# Altium PCB TS6A22362-PJ31A6A-PCB.pcbdoc
Units mil, origin at the board's own origin, x right, y up, seen from the top; angles counter-clockwise.
Board outline not stored, 2 copper layers (Top Layer, Bottom Layer); 3 components, 0 nets, 19 pads, 0 vias.
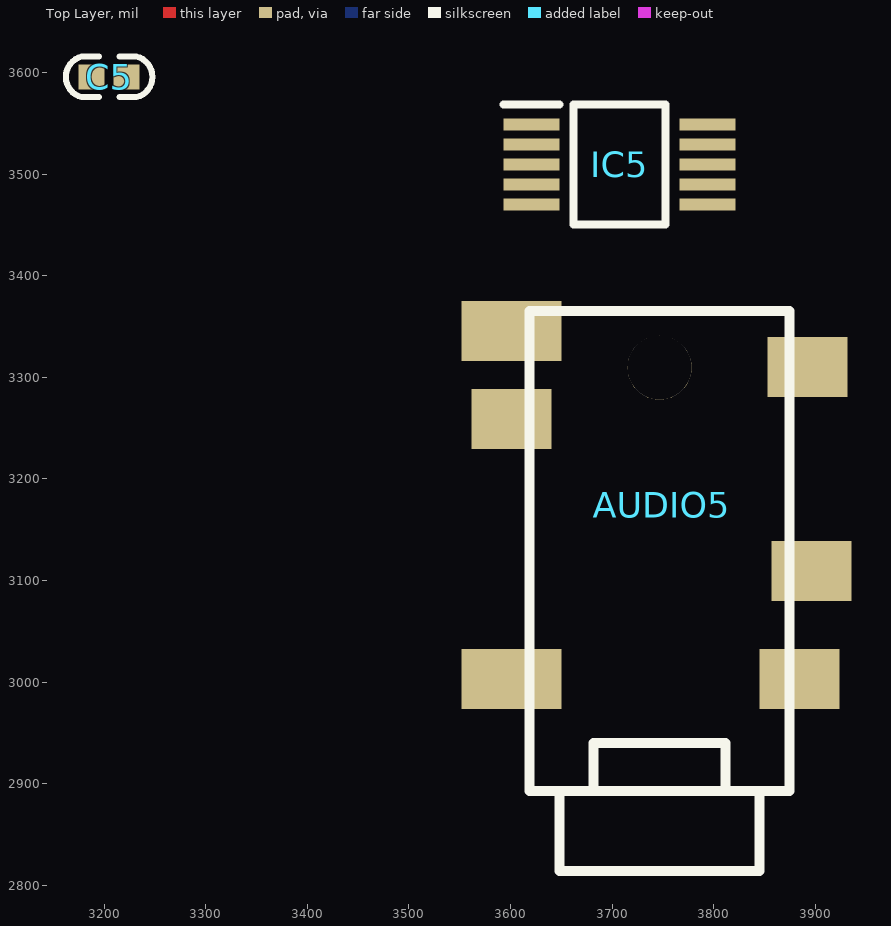
[diagram p0: Top Layer view]
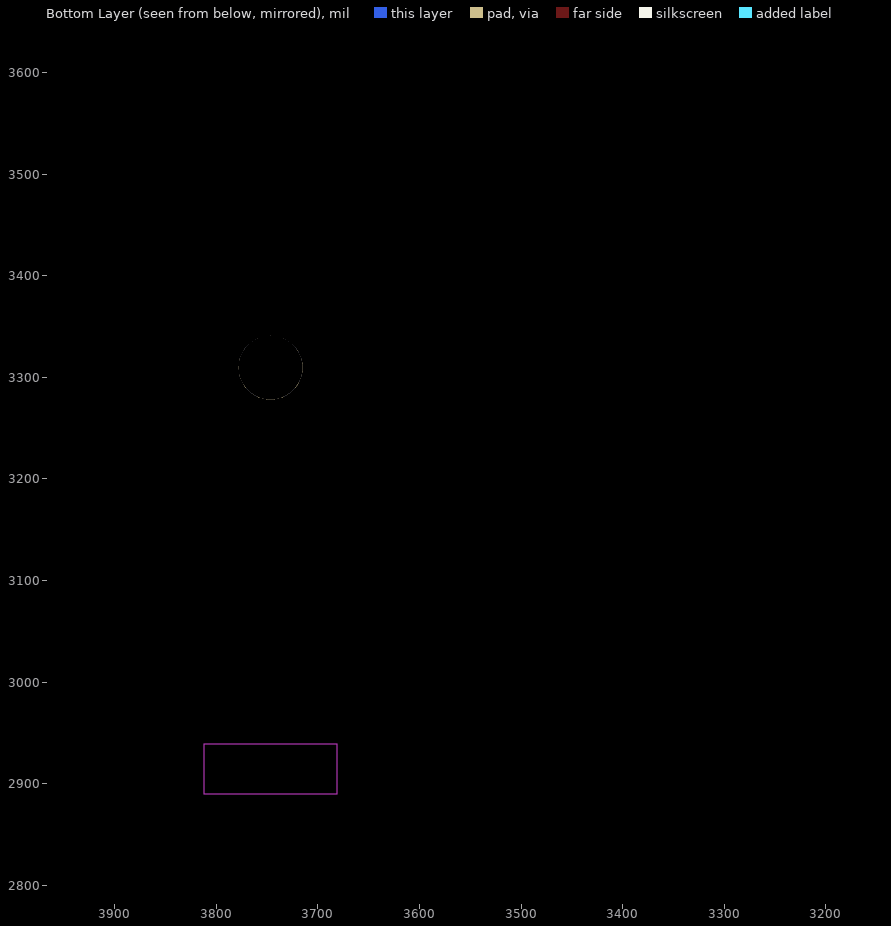
[diagram p1: Bottom Layer view, seen from below]

## Layer stack, top to bottom
Top Solder: solder mask 0.4, Solder Resist, Dk 3.5
Top Layer: signal copper 1.4
Dielectric 1: dielectric 12.6, FR-4, Dk 4.8
Bottom Layer: signal copper 1.4
Bottom Solder: solder mask 0.4, Solder Resist, Dk 3.5

## Components (designator, comment, footprint, x,y, rotation, side; value= is the part's Value field where it differs from the comment)
AUDIO5 "PJ-316A-6A" PJ-316A-6A 3746.61,3174.49 r180 top
C5 "100nF 16V" 0402C 3204.88,3595.75 r180 top
IC5 "TS5A22362DGSR" SOP50P490X110-10N 3707.24,3509.69 r0 top

## Footprints (in the part's own frame and the unit in brackets; to place one, negate y for a bottom-side part, rotate by r counter-clockwise, add the part's x,y. Pads: shape width x height; smd on the part's side, far side on the other; paste and mask are expansions set on the pad)
0402C [mm]
  rect 0.65x0.62 smd: 1(-0.44,0) 2(0.44,0)
  silkscreen extent -1.08,-0.51 1.08,0.51, body extent -0.51,-0.25 0.49,0.25, height 0.55
PJ-316A-6A [mm]
  rect 2x1.5 smd: 1(-3.5,4.35) 2(3.7,-2.15) 3(-3.8,1.65) 6(-3.7,-3.45)
  rect 2.5x1.5 smd: 4(3.7,4.35) 5(3.7,-4.35)
  round 1.6 hole 1.6 unplated: ""(0,-3.429)
  Keep-Out Layer board cut-out: -1.651,5.969 1.651,5.969 1.651,7.239 -1.651,7.239
  silkscreen extent -3.25,-4.85 3.25,9.15, body extent -4.05,-4.9 4.25,9.1, height 4.4
SOP50P490X110-10N [mm]
  rect 1.4x0.3 smd: 1(-2.2,1) 2(-2.2,0.5) 3(-2.2,0) 4(-2.2,-0.5) 5(-2.2,-1) 6(2.2,-1) 7(2.2,-0.5) 8(2.2,0) 9(2.2,0.5) 10(2.2,1)
  silkscreen extent -2.9,-1.5 1.15,1.5, body extent -2.45,-1.5 2.45,1.5, height 1.1

## Part data
AUDIO5: BOM_Manufacturer=HRO, Manufacturer 1="HRO Electronics", Supplier Part Number 1=C128987, BOM_Manufacturer Part=PJ-316A-6A, BOM_Supplier=LCSC, BOM_Supplier Part=C128987, Contributor=LCSC, Manufacturer Part Number 1=PJ-316A-6A, Pricing 1="1=0.2891, 10=0.2162, 30=0.2027, 100=0.1893, 500=0.1834, 1000=0.1804, 1=0.2697, 10=0.2016, 30=0.1891, 100=0.1766, 500=0.171, 1000=0.1683, 1=1.3646, 10=1.0202, 30=0.9569, 100=0.8936, 500=0.8654, 1000=0.8515, 1=1.3049, 10=0.9755, 30=0.9149, 100=0.8544, 500=0.8275, 1000=0.8142, 1=0.1752, 10=0.131, 30=0.1229, 100=0.1147, 500=0.1111, 1000=0.1093, 1=0.1579, 10=0.118, 30=0.1107, 100=0.1034, 500=0.1001, 1000=0.0985, 1=1.5823, 10=1.1829, 30=1.1095, 100=1.0361, 500=1.0035, 1000=0.9873, 1=21.3783, 10=15.982, 30=14.9903, 100=13.9984, 500=13.5574, 1000=13.3397, 1=0.8481, 10=0.634, 30=0.5947, 100=0.5553, 500=0.5378, 1000=0.5292, 1=16.4487, 10=12.2967, 30=11.5336, 100=10.7705, 500=10.4312, 1000=10.2637, 1=1.8173, 10=1.3586, 30=1.2743, 100=1.19, 500=1.1525, 1000=1.134, 1=0.2784, 10=0.2081, 30=0.1952, 100=0.1823, 500=0.1765, 1000=0.1737, 1=0.20414, 10=0.15261, 30=0.14314, 100=0.13367, 500=0.12946, 1000=0.12738 (AUD)", spicePre=A, Stock 1=6091, Supplier 1=LCSC
C5: library part CAP-NP
IC5: "模拟切换芯片", Case/Package=VSSOP, High Level Output Current=150mA, Manufacturer 1="Texas Instruments", Max Operating Temperature=85°C, Max Supply Current=1.3uA, Max Supply Voltage=5.5V, Min Operating Temperature=-40°C, Min Supply Voltage=2.3V, Mouser Part Number=595-TS5A22362DGSR, Nominal Supply Current=200nA, On-State Resistance=940mR, Package Quantity=1, Supplier Part Number 1=C201663, Arrow Part Number=TS5A22362DGSR, Arrow Price/Stock=https://www.arrow.com/en/products/ts5a22362dgsr/texas-instruments, Bandwidth=17MHz, ComponentLink1Description=http://www.ti.com/lit/pdf/slyb191?src-supplier=Digi-Key, ComponentLink1URL=http://www.ti.com/lit/pdf/slyb191?src-supplier=Digi-Key, ComponentLink2Description=https://www.verical.com/server-webapp/html/getDatasheet?partID=252009&src-supplier=Verical, ComponentLink2URL=https://www.verical.com/server-webapp/html/getDatasheet?partID=252009&src-supplier=Verical, ComponentLink3Description=http://www.ti.com/lit/ds/symlink/ts5a22362.pdf?src-supplier=Digi-Key, ComponentLink3URL=http://www.ti.com/lit/ds/symlink/ts5a22362.pdf?src-supplier=Digi-Key, ComponentLink4Description=http://www.farnell.com/datasheets/1877050.pdf?src-supplier=Element14, ComponentLink4URL=http://www.farnell.com/datasheets/1877050.pdf?src-supplier=Element14, ComponentLink5Description=http://www.ti.com/lit/ds/symlink/ts5a22364.pdf?src-supplier=Element14, ComponentLink5URL=http://www.ti.com/lit/ds/symlink/ts5a22364.pdf?src-supplier=Element14, ComponentLink6Description=http://focus.ti.com/lit/ds/symlink/ts5a22362.pdf?src-supplier=Avnet, ComponentLink6URL=http://focus.ti.com/lit/ds/symlink/ts5a22362.pdf?src-supplier=Avnet, ComponentLink7Description=http://www.produktinfo.conrad.com/datenblaetter/1100000-1199999/001187342-da-01-en-IC_SWITCH_DUAL_TS5A22362DGSR_MSOP_10_TID.pdf?src-supplier=Conrad, ComponentLink7URL=http://www.produktinfo.conrad.com/datenblaetter/1100000-1199999/001187342-da-01-en-IC_SWITCH_DUAL_TS5A22362DGSR_MSOP_10_TID.pdf?src-supplier=Conrad, Contact Plating=Gold, Datasheet Link=http://componentsearchengine.com/Datasheets/3/TS5A22362DGSR.pdf, Description 1="IC, SWITCH SPDT DUAL 10MSOP", Height=1.1mm, Height 1=0.95mm, Lead Free="Lead Free", Length=3.1mm, Low Level Output Current=150mA, Manufacturer_Name="Texas Instruments", Manufacturer_Part_Number=TS5A22362DGSR, Manufacturer Part Number 1=TS5A22362DGSR, Mount="Surface Mount", Mouser Price/Stock=https://www.mouser.com/Search/Refine.aspx?Keyword=595-TS5A22362DGSR, Number of Channels=2, Number of Inputs=2, Number of Outputs=4, Number of Pins=10, Operating Supply Current=200nA, Packaging="Tape and Reel", Polarity=Non-Inverting, Pricing 1="1=1.4607, 10=1.0614, 30=0.9884, 100=0.9154, 500=0.8813, 1000=0.8667, 1=1.3624, 10=0.99, 30=0.9219, 100=0.8538, 500=0.822, 1000=0.8084, 1=6.8938, 10=5.0095, 30=4.6648, 100=4.3201, 500=4.1593, 1000=4.0903, 1=6.5918, 10=4.7901, 30=4.4605, 100=4.1309, 500=3.9771, 1000=3.9112, 1=0.8852, 10=0.6432, 30=0.599, 100=0.5547, 500=0.534, 1000=0.5252, 1=0.7975, 10=0.5795, 30=0.5397, 100=0.4998, 500=0.4812, 1000=0.4732, 1=7.9936, 10=5.8087, 30=5.409, 100=5.0093, 500=4.8228, 1000=4.7429, 1=107.9987, 10=78.4791, 30=73.0792, 100=67.6792, 500=65.1593, 1000=64.0792, 1=4.2843, 10=3.1133, 30=2.8991, 100=2.6848, 500=2.5849, 1000=2.542, 1=83.095, 10=60.3824, 30=56.2277, 100=52.0729, 500=50.134, 1000=49.303, 1=9.1808, 10=6.6714, 30=6.2124, 100=5.7533, 500=5.5391, 1000=5.4473, 1=1.4063, 10=1.0219, 30=0.9516, 100=0.8813, 500=0.8485, 1000=0.8344, 1=1.03125, 10=0.74938, 30=0.69781, 100=0.64625, 500=0.62219, 1000=0.61188 (AUD)", Radiation Hardening=No, REACH SVHC="No SVHC", Stock 1=7821, Supplier 1=LCSC, Supply Type=Single, Termination=SMD/SMT, Throw Configuration=SPDT, Turn-Off Delay Time=70ns, Turn-On Delay Time=80ns, Weight=0.000663oz, Width=3.1mm

## Nets (pads, with @x,y where several pads share a name; then routed paths per layer and width w, separated by ;. In a path a pad name is that pad's centre, name@x,y a point inside that pad or via, vN(x,y) a via of type N, cw(c..) or ccw(c..) an arc to the next point about the centre after c; other vN are vias at no path point)
pads on no net: AUDIO5. AUDIO5.1 AUDIO5.2 AUDIO5.3 AUDIO5.4 AUDIO5.5 AUDIO5.6 C5.1 C5.2 IC5.1 IC5.2 IC5.3 IC5.4 IC5.5 IC5.6 IC5.7 IC5.8 IC5.9 IC5.10